# EAGLE board to_manufacturer_board_temp (EAGLE 5.11)

Size 55.15 x 34.1 mm. Coordinates in mm from the lower left corner, seen from the top.
Outline: 0,0 55.15,0 55.15,34.1 0,34.1 0,0
Copper layers (1*16): Top 0.035mm / dielectric 1.5mm / Bottom 0.035mm
Design rules "default": minimum track width 10mil, minimum drill 24mil, track to track 8mil, track to pad 8mil, pad to pad 8mil, via to via 8mil, smd to smd 8mil, copper to edge 40mil, drill to drill 8mil, minimum pad ring 10mil, minimum via ring 8mil, stop-mask expansion 4mil, vias tented up to drill 0mil, thermal gap 10mil
Holes 2.8 mm at 50,2.75 10,31.25

## Footprints (pad centres in the part's own frame; a part is rotated, then mirrored left to right if it is on the bottom)
PS1720P02_BUZZER = drill 0.8 round: P$1 -5.08,0; P$2 5.08,0
E3,5-8 = drill 0.813 pad 1.6 round: + -1.778,0 | drill 0.813 pad 1.6 octagon: - 1.778,0
E1.5-5 = drill 0.8 round: + -0.77,0 | drill 0.8 octagon: - 0.79,0
C1206 = smd 1.6 x 1.8: 1 -1.4,0; 2 1.4,0
1X2_POWER_WIRE = drill 1.2 round: V+ -1.27,0; V- 1.27,0
DO41-10 = drill 1.118 round: A 5.08,0; C -5.08,0
2X3_ISP = drill 0.8 round: GND 1.27,-5.08; MISO -1.27,0; MOSI 1.27,-2.54; RST -1.27,-5.08; SCK -1.27,-2.54; V+ 1.27,0
1X2_GENERIC = drill 0.8 round: 1 0,0; 2 2.54,0
TQFP32-08 = smd 1.27 x 0.559: 1 -4.293,2.8; 2 -4.293,2; 3 -4.293,1.2; 4 -4.293,0.4; 5 -4.293,-0.4; 6 -4.293,-1.2; 7 -4.293,-2; 8 -4.293,-2.8; 17 4.293,-2.8; 18 4.293,-2; 19 4.293,-1.2; 20 4.293,-0.4; 21 4.293,0.4; 22 4.293,1.2; 23 4.293,2; 24 4.293,2.8 | smd 0.559 x 1.27: 9 -2.8,-4.293; 10 -2,-4.293; 11 -1.2,-4.293; 12 -0.4,-4.293; 13 0.4,-4.293; 14 1.2,-4.293; 15 2,-4.293; 16 2.8,-4.293; 25 2.8,4.293; 26 2,4.293; 27 1.2,4.293; 28 0.4,4.293; 29 -0.4,4.293; 30 -1.2,4.293; 31 -2,4.293; 32 -2.8,4.293
R0805 = smd 1.3 x 1.5: 1 -0.95,0; 2 0.95,0
SEGMENT_CLOCK_DISPLAY_HDSP_433G = drill 0.8 round: 1 0,-5.08; 2 2.54,-5.08; 3 5.08,-5.08; 4 7.62,-5.08; 5 10.16,-5.08; 6 12.7,-5.08; 7 15.24,-5.08; 8 15.24,5.08; 9 7.62,5.08; 10 5.08,5.08; 11 0,5.08; 12 -2.54,5.08
SOT223 = smd 1.219 x 2.235: 1 -2.311,-3.099; 2 0,-3.099; 3 2.311,-3.099 | smd 3.6 x 2.2: 4 0,3.099

## Placement (x,y rotation side)
BZ1  PS1720P02_BUZZER  [PS1720P02_BUZZER]  41.18,10.79 0 top
C1  220uF  [E3,5-8]  22.13,25.54 270 top
C2  22uF  [E1.5-5]  4.35,26.04 270 top
C3  100nF  [C1206]  26.57,19.05 0 top
C4  100nF  [C1206]  45.62,32.38 0 top
CON1  CONNECTOR_2PIN1X2_POWER_WIRE  [1X2_POWER_WIRE]  52.61,29.21 90 top
D1  1N4004  [DO41-10]  30.38,31.75 0 top
ISP  CONNECTOR_6PIN2X3_ISP  [2X3_ISP]  51.34,19.05 180 top
J1  CONNECTOR_2PIN1X2  [1X2_GENERIC]  28.48,25.4 90 top
MCU1  ATMEGA48-20PU-32TQFP  [TQFP32-08]  41.18,25.4 0 top
R1  1M  [R0805]  31.66,20.32 270 top
R2  500k  [R0805]  31.66,26.04 270 top
R3  1k  [R0805]  17.05,19.05 90 top
R4  1k  [R0805]  6.89,19.05 270 top
R5  1k  [R0805]  9.43,19.05 270 top
R6  1k  [R0805]  19.59,19.05 270 top
R7  1k  [R0805]  11.97,19.05 270 top
R8  1k  [R0805]  4.35,19.05 270 top
R9  1k  [R0805]  1.81,19.05 270 top
R10  1k  [R0805]  14.51,19.05 270 top
SEGMENT1  SEGMENT_CLOCK_MODULE_3_DIGIT_COMMON_CATHODE  [SEGMENT_CLOCK_DISPLAY_HDSP_433G]  8.16,8.89 0 top
SW1  CONNECTOR_2PIN1X2  [1X2_GENERIC]  52.61,13.97 270 top
VREG  5VREG_TLV1117  [SOT223]  13.24,25.4 90 top

## Library data of the parts
BZ1 D1 MCU1 SEGMENT1 VREG = project_specific_parts
C1 = RCL
C2-C4 R1-R10 = RC_and_L
CON1 ISP J1 SW1 = connectors

## Nets
#RESET: ISP.RST MCU1.29
+5V: C2.+ ISP.V+ MCU1.4 MCU1.6 MCU1.18 VREG.2 VREG.4
GND: BZ1.P$2 C1.- C2.- C3.2 C4.2 CON1.V- ISP.GND J1.1 MCU1.3 MCU1.5 MCU1.21 R2.1 SW1.1 VREG.1
MISO: ISP.MISO MCU1.16
MOSI: ISP.MOSI MCU1.15
N$1: C1.+ D1.C VREG.3
N$2: C4.1 MCU1.20
N$4: J1.2 MCU1.1
N$5: MCU1.22 R1.1 R2.2
N$6: C3.1 R1.2 R3.1
N$7: R4.2 SEGMENT1.10
N$8: R5.2 SEGMENT1.9
N$9: R6.2 SEGMENT1.3
N$10: R7.2 SEGMENT1.4
N$11: R8.2 SEGMENT1.2
N$12: R9.2 SEGMENT1.12
N$13: R10.2 SEGMENT1.8
N$14: BZ1.P$1 MCU1.11
PB0: MCU1.12 R4.1
PB1: MCU1.13 R5.1
PB2: MCU1.14 R6.1
PB6: MCU1.7 R7.1
PB7: MCU1.8 R8.1
PC0: MCU1.23 R9.1
PC1: MCU1.24 R10.1
PC2: MCU1.25 SEGMENT1.1
PC3: MCU1.26 SEGMENT1.11
PC4: MCU1.27 SEGMENT1.5
PC5: MCU1.28 SEGMENT1.7
PD2(INT0): MCU1.32 SW1.2
SCK: ISP.SCK MCU1.17
V_GUNBATTERY: CON1.V+ D1.A R3.2

## Tracks (layer width: path | path; a pad name or v marks a point on that pad's centre or on a via)
#RESET  (1 unrouted)
+5V  (6 unrouted)
GND  (13 unrouted)
MISO  (1 unrouted)
MOSI  (1 unrouted)
N$1  (2 unrouted)
N$2  (1 unrouted)
N$4  (1 unrouted)
N$5  (2 unrouted)
N$6  (2 unrouted)
N$7  (1 unrouted)
N$8  (1 unrouted)
N$9  (1 unrouted)
N$10  (1 unrouted)
N$11  (1 unrouted)
N$12  (1 unrouted)
N$13  (1 unrouted)
N$14  (1 unrouted)
PB0  (1 unrouted)
PB1  (1 unrouted)
PB2  (1 unrouted)
PB6  (1 unrouted)
PB7  (1 unrouted)
PC0  (1 unrouted)
PC1  (1 unrouted)
PC2  (1 unrouted)
PC3  (1 unrouted)
PC4  (1 unrouted)
PC5  (1 unrouted)
PD2(INT0)  (1 unrouted)
SCK  (1 unrouted)
V_GUNBATTERY  (2 unrouted)